# Altium PCB PCB1.PcbDoc
Units mm, origin at the board's own origin, x right, y up, seen from the top; angles counter-clockwise.
Board outline 31.16 x 27.53 mm, 2 copper layers (Top Layer, Bottom Layer); 9 components, 25 nets, 59 pads, 20 vias.
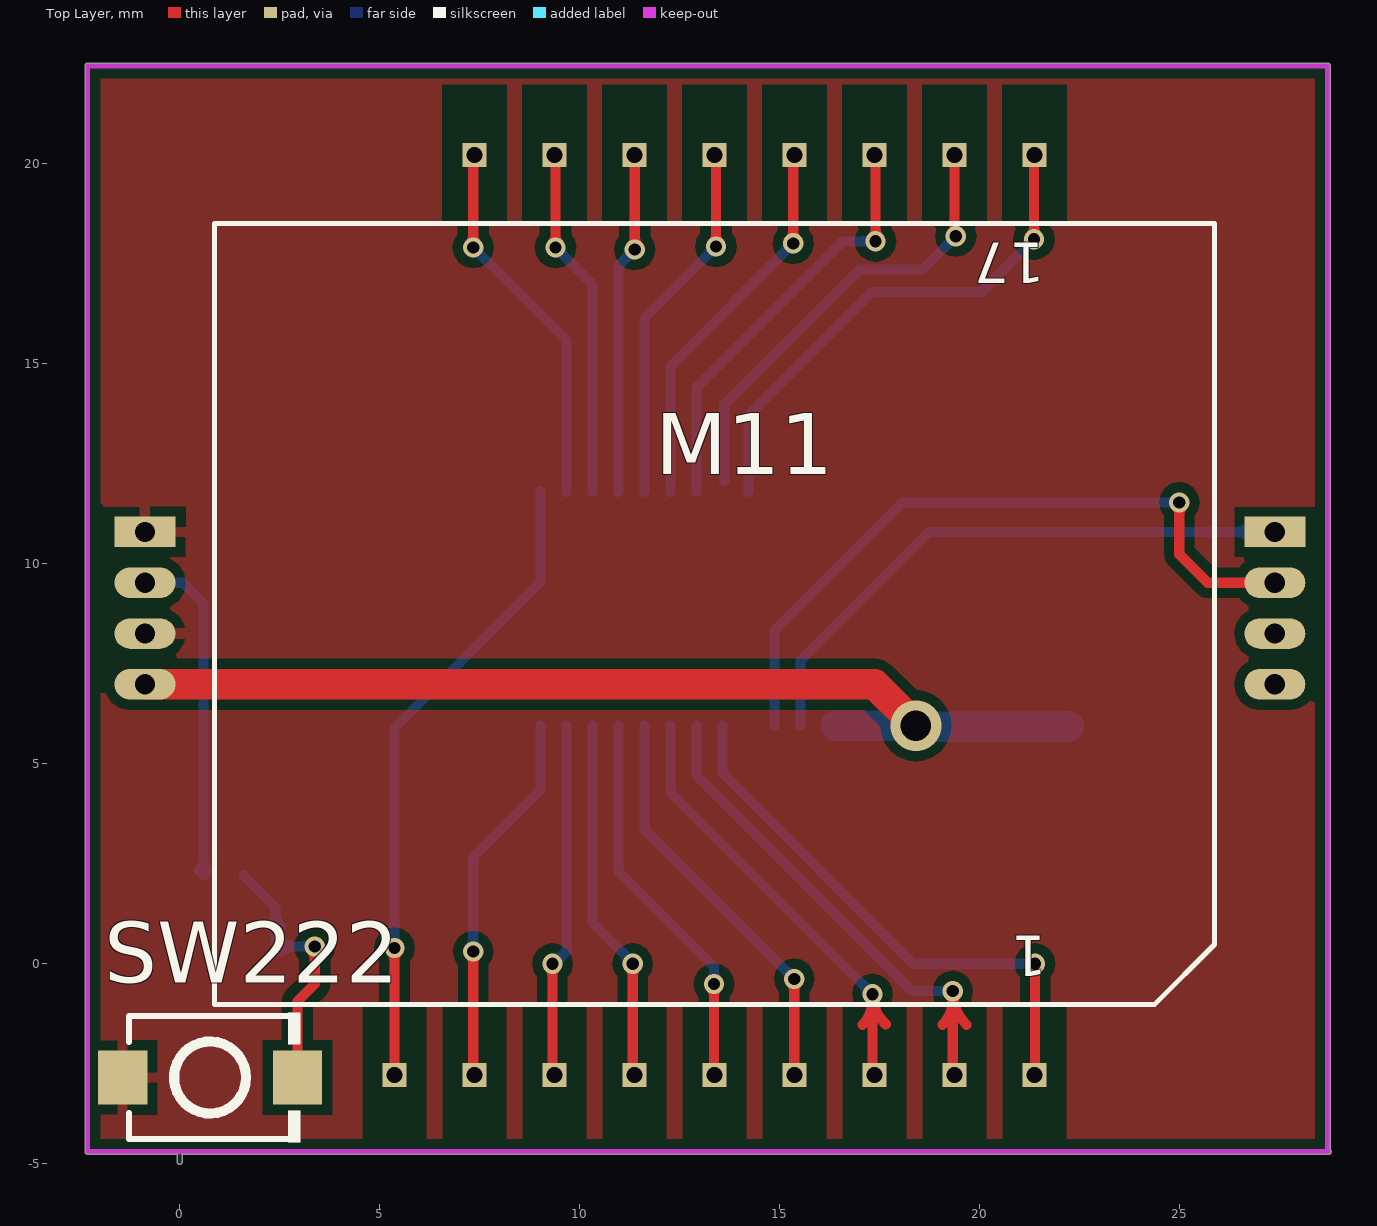
[diagram p0: Top Layer view]
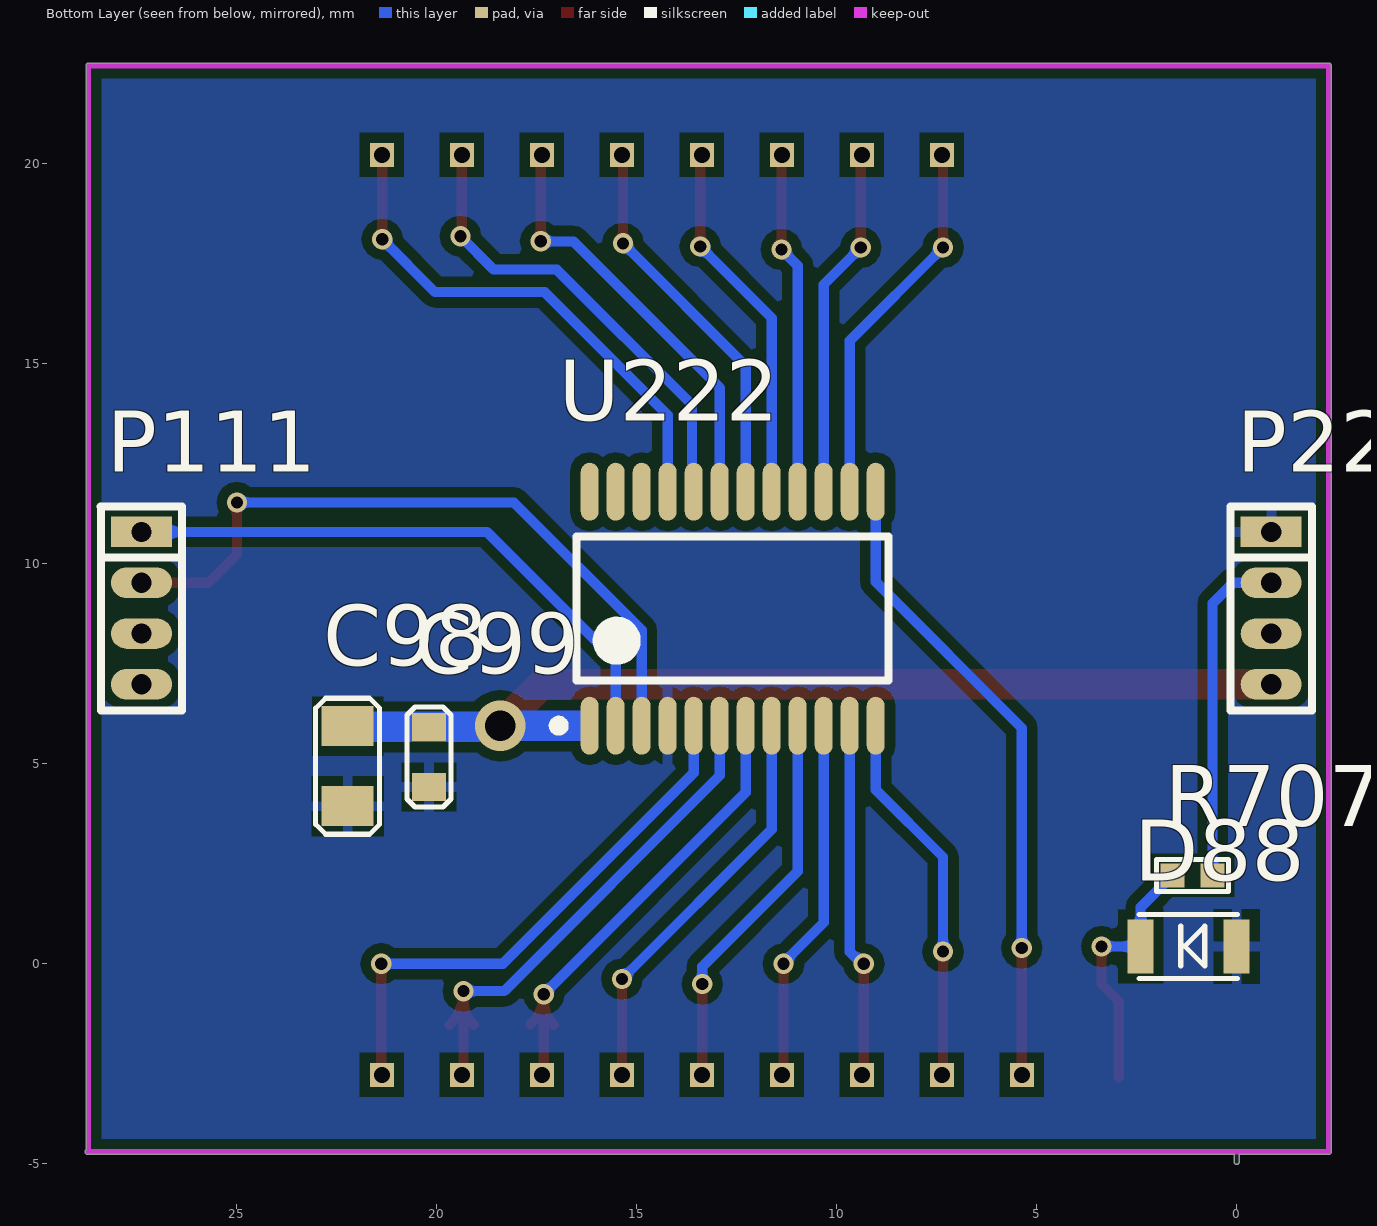
[diagram p1: Bottom Layer view, seen from below]

## Layer stack, top to bottom
Top Layer: signal copper 0.0356
Dielectric: dielectric 0.32, FR-4, Dk 4.8
Bottom Layer: signal copper 0.0356

## Board outline
-2.364,-4.7 ccw(c-2.3,-4.7) -2.3,-4.764 -0.064,-4.764 -0.064,-4.953 ccw(c0,-4.953) 0.064,-4.953 0.064,-4.764 28.727,-4.764 ccw(c28.727,-4.7) 28.791,-4.7 ccw(c28.727,-4.7) 28.764,-4.648 28.764,22.454 ccw(c28.7,22.454) 28.679,22.514 -2.261,22.514 ccw(c-2.261,22.45) -2.28,22.511 ccw(c-2.3,22.45) -2.364,22.45

## Design rules (kind name [scope] priority, off if disabled: settings)
Clearance [All] p1: gap=0.254
PolygonConnect [All] p1: connectstyle=Relief reliefconductorwidth=0.254 reliefentries=4 polygonreliefangle="90 Angle"
RoutingVias [All] p1: holewidth=0.711 width=1.27 viastyle="Through Hole" minholewidth=0.711 minwidth=1.27 maxholewidth=0.711 maxwidth=1.27
SilkscreenOverComponentPads [All] p1: minsilkscreentomaskgap=0.254
SolderMaskExpansion [All] p1: expansion=0.102
Width [All] p1: maxlimit=5.08 minlimit=0.254 preferedwidth=0.254
27 further rules are at their usual default settings.

## Components (designator, comment, footprint, x,y, rotation, side; value= is the part's Value field where it differs from the comment)
C98 "10uF/50V" 0805C 22.225,3.937 r90 bottom
C99 "0.1uF/50V" 0603C 20.193,4.42 r90 bottom
D88 "CESDB5V0D3" SOD323 0,0.432 r0 bottom
M11 "YR-90823A" YR-90823A 21.373,-2.777 r180 top locked
P111 "Header 4" 1.27-4P 27.381,10.795 r270 bottom locked
P222 "Header 4" 1.27-4P -0.864,10.795 r270 bottom locked
R707 "RESISTOR_0" 0402R 1.6,2.21 r180 bottom
SW222 "SW PUSHBUTTON" SW-SMD_L3.9-W3.0-P4.45 0.762,-2.845 r0 top
U222 "HT16C21A-24SOP" SOP65P640X265-24N 12.598,8.875 r90 bottom

## Footprints (in the part's own frame and the unit in brackets; to place one, negate y for a bottom-side part, rotate by r counter-clockwise, add the part's x,y. Pads: shape width x height; smd on the part's side, far side on the other; paste and mask are expansions set on the pad)
1.27-4P [mil]
  rect 30x60 hole 20: 1(0,0)
  oval 30x60 hole 20: 2(50,0) 3(100,0) 4(150,0)
  silkscreen extent -25,-40 176,40
0402R [mm]
  rect 0.6x0.6 smd: 1(0,0) 2(1,0)
  silkscreen extent -0.4,-0.4 1.4,0.4
0603C [mm]
  rect 0.7x0.85 smd: 1(0,0) 2(1.5,0)
  silkscreen extent -0.5,-0.55 2,0.55
0805C [mm]
  rect 1x1.3 smd: 1(0,0) 2(2,0)
  silkscreen extent -0.7,-0.8 2.7,0.8
SOD323 [mm]
  rect 0.65x1.35 smd: 1(0,0) 2(2.4,0)
  silkscreen extent -0.03,-0.8 2.44,0.8
SOP65P640X265-24N [mm] "SOP, 24-Leads, Body 7.8x4.4mm (max), Pitch 0.65mm, IPC Medium Density"
  oval 1.45x0.45 smd: 1(-2.925,3.575) 2(-2.925,2.925) 3(-2.925,2.275) 4(-2.925,1.625) 5(-2.925,0.975) 6(-2.925,0.325) 7(-2.925,-0.325) 8(-2.925,-0.975) 9(-2.925,-1.625) 10(-2.925,-2.275) 11(-2.925,-2.925) 12(-2.925,-3.575) 13(2.925,-3.575) 14(2.925,-2.925) 15(2.925,-2.275) 16(2.925,-1.625) 17(2.925,-0.975) 18(2.925,-0.325) 19(2.925,0.325) 20(2.925,0.975) 21(2.925,1.625) 22(2.925,2.275) 23(2.925,2.925) 24(2.925,3.575)
  silkscreen extent -3.05,-3.9 1.8,4.47, body extent -2.2,-3.9 2.2,3.9, height 2.65
SW-SMD_L3.9-W3.0-P4.45 [mm]
  rect 1.23x1.36 smd: 1(-2.185,0) 2(2.185,0)
  silkscreen extent -2.03,-1.62 2.25,1.62
YR-90823A [mm]
  rect 0.6x0.6 hole 0.4: 1(0,0) 2(2,0) 3(4,0) 4(6,0) 5(8,0) 6(10,0) 7(12,0) 8(14,0) 9(16,0) 10(14,-23) 11(12,-23) 12(10,-23) 13(8,-23) 14(6,-23) 15(4,-23) 16(2,-23) 17(0,-23)
  silkscreen extent -4.5,-21.29 20.5,-1.75

## Part data
C98 C99: library part Cap, "Capacitor"
D88: library part "DIODE S", "Schottky Diode"
P111 P222: "Header, 4-Pin"

## Via types
v1: diameter 0.508, hole 0.305, Top Layer to Bottom Layer, tented both sides, 19 vias
v2: diameter 1.27, hole 0.762, Top Layer to Bottom Layer, tented both sides, 1 vias

## Nets (pads, with @x,y where several pads share a name; then routed paths per layer and width w, separated by ;. In a path a pad name is that pad's centre, name@x,y a point inside that pad or via, vN(x,y) a via of type N, cw(c..) or ccw(c..) an arc to the next point about the centre after c; other vN are vias at no path point)
COM0: M11.1 U222.5 | length 15.7
  Top Layer w0.254: M11.1@21.387,-2.763 v1(21.387,0) ; 21.387,-0.307 cw(c21.693,-0.307) 21.477,-0.09 ccw(c21.693,-0.307) 21.387,-0.307 ; 21.387,-0.307 ccw(c21.08,-0.307) 21.297,-0.09 cw(c21.08,-0.307) 21.387,-0.307
  Bottom Layer w0.254: U222.5 13.573,4.773 18.346,0 v1(21.387,0) v1@21.438,0 ; 21.08,0 cw(c21.08,-0.307) 21.297,-0.09 ccw(c21.08,-0.307) 21.08,0 ; 21.08,0 ccw(c21.08,0.307) 21.297,0.09 cw(c21.08,0.307) 21.08,0
COM1: M11.2 U222.6 | length 17.1
  Top Layer w0.254: M11.2@19.329,-2.733 v1(19.329,-0.686) ; 19.329,-0.992 cw(c19.636,-0.992) 19.419,-0.776 ccw(c19.636,-0.992) 19.329,-0.992 ; 19.329,-0.992 ccw(c19.023,-0.992) 19.24,-0.776 cw(c19.023,-0.992) 19.329,-0.992 ; 19.074,-1.527 ccw(c18.456,-0.91) 19.329,-0.91 cw(c18.456,-0.91) 19.074,-1.527 ; v1@19.329,-0.701 ccw(c20.499,-0.701) 19.672,-1.527 cw(c20.499,-0.701) v1@19.329,-0.701
  Bottom Layer w0.254: U222.6 12.923,4.704 18.313,-0.686 v1(19.329,-0.686) ; 19.023,-0.686 cw(c19.023,-0.992) 19.24,-0.776 ccw(c19.023,-0.992) 19.023,-0.686 ; 19.023,-0.686 ccw(c19.023,-0.379) 19.24,-0.596 cw(c19.023,-0.379) 19.023,-0.686
COM2: M11.3 U222.7 | length 15.7
  Top Layer w0.254: M11.3@17.323,-2.727 v1(17.323,-0.762) ; 17.323,-1.069 cw(c17.629,-1.069) 17.413,-0.852 ccw(c17.629,-1.069) 17.323,-1.069 ; 17.323,-1.069 ccw(c17.016,-1.069) 17.233,-0.852 cw(c17.016,-1.069) 17.323,-1.069 ; v1(17.323,-0.762) ccw(c18.334,-0.762) 17.656,-1.513 cw(c18.334,-0.762) v1(17.323,-0.762) ; 17.074,-1.527 ccw(c16.472,-0.926) 17.323,-0.926 cw(c16.472,-0.926) 17.074,-1.527
  Bottom Layer w0.254: U222.7 12.273,4.287 v1(17.323,-0.762) ; 17.106,-0.545 cw(c16.889,-0.762) 17.196,-0.762 ccw(c16.889,-0.762) 17.106,-0.545 ; 17.106,-0.545 ccw(c17.323,-0.328) 17.323,-0.635 cw(c17.323,-0.328) 17.106,-0.545
COM3: M11.4 U222.8 | length 12.2
  Top Layer w0.254: M11.4@15.367,-2.771 v1(15.367,-0.381) ; 15.367,-0.688 cw(c15.674,-0.688) 15.457,-0.471 ccw(c15.674,-0.688) 15.367,-0.688 ; 15.367,-0.688 ccw(c15.06,-0.688) 15.277,-0.471 cw(c15.06,-0.688) 15.367,-0.688
  Bottom Layer w0.254: U222.8 11.623,3.363 v1(15.367,-0.381) v1@15.367,-0.356 ; 15.15,-0.164 cw(c14.933,-0.381) 15.24,-0.381 ccw(c14.933,-0.381) 15.15,-0.164 ; 15.15,-0.164 ccw(c15.367,0.053) 15.367,-0.254 cw(c15.367,0.053) 15.15,-0.164
GND: C98.1 C99.1 D88.1 P222.1 P222.3 SW222.1 U222.4
I2C_SCL: P111.4
I2C_SDA: P111.3
KEY: P222.2 R707.2 | length 9.8
  Bottom Layer w0.254: P222.2 0.087,9.525 0.6,9.011 R707.2 ; 0.6,2.627 cw(c0.183,2.627) 0.478,2.332 ccw(c0.183,2.627) 0.6,2.627 ; 0.6,2.627 ccw(c1.018,2.627) 0.723,2.332 cw(c1.018,2.627) 0.6,2.627
LCD_I2C_SCL: P111.2 U222.3 | length 19.7
  Top Layer w0.254: v1(24.994,11.532) 24.994,10.236 25.705,9.525 P111.2 ; 24.994,11.225 cw(c25.3,11.225) 25.083,11.442 ccw(c25.3,11.225) 24.994,11.225 ; 24.994,11.225 ccw(c24.687,11.225) 24.904,11.442 cw(c24.687,11.225) 24.994,11.225
  Bottom Layer w0.254: U222.3 14.873,8.336 18.069,11.532 v1(24.994,11.532) ; 24.687,11.532 cw(c24.687,11.225) 24.904,11.442 ccw(c24.687,11.225) 24.687,11.532 ; 24.687,11.532 ccw(c24.687,11.838) 24.904,11.621 cw(c24.687,11.838) 24.687,11.532
LCD_I2C_SDA: P111.1 U222.2 | length 16.7
  Bottom Layer w0.254: U222.2 15.523,7.573 18.745,10.795 P111.1 ; 26.387,10.795 cw(c26.387,10.182) 26.821,10.615 ccw(c26.387,10.182) 26.387,10.795 ; 26.387,10.795 ccw(c26.387,11.408) 26.821,10.975 cw(c26.387,11.408) 26.387,10.795
NetD88_2: D88.2 R707.1 SW222.2 | length 11.5
  Top Layer w0.254: SW222.2 2.947,-0.939 3.378,-0.508 v1(3.378,0.432) ; 3.378,0.125 cw(c3.685,0.125) 3.468,0.342 ccw(c3.685,0.125) 3.378,0.125 ; 3.378,0.125 ccw(c3.072,0.125) 3.288,0.342 cw(c3.072,0.125) 3.378,0.125
  Bottom Layer w0.254: R707.1 2.4,1.41 D88.2 v1(3.378,0.432) ; 2.4,1.26 cw(c1.922,1.26) 2.26,0.922 ccw(c1.922,1.26) 2.4,1.26 ; 2.4,1.26 ccw(c2.878,1.26) 2.54,0.922 cw(c2.878,1.26) 2.4,1.26 ; 2.878,0.432 cw(c2.878,0.91) 2.54,0.572 ccw(c2.878,0.91) 2.878,0.432 ; 2.878,0.432 ccw(c2.878,-0.046) 2.54,0.292 cw(c2.878,-0.046) 2.878,0.432 ; 3.072,0.432 cw(c3.072,0.125) 3.288,0.342 ccw(c3.072,0.125) 3.072,0.432 ; 3.072,0.432 ccw(c3.072,0.738) 3.288,0.522 cw(c3.072,0.738) 3.072,0.432
SEG1: M11.5 U222.9 | length 11.6
  Top Layer w0.254: M11.5@13.36,-2.764 v1(13.36,-0.508) ; 13.36,-0.815 cw(c13.667,-0.815) 13.45,-0.598 ccw(c13.667,-0.815) 13.36,-0.815 ; 13.36,-0.815 ccw(c13.054,-0.815) 13.271,-0.598 cw(c13.054,-0.815) 13.36,-0.815
  Bottom Layer w0.254: U222.9 10.973,2.311 13.36,-0.076 v1(13.36,-0.508) ; 13.36,-0.201 cw(c13.054,-0.201) 13.271,-0.418 ccw(c13.054,-0.201) 13.36,-0.201 ; 13.36,-0.201 ccw(c13.667,-0.201) 13.45,-0.418 cw(c13.667,-0.201) 13.36,-0.201
SEG2: M11.6 U222.10 | length 11
  Top Layer w0.254: M11.6@11.328,-2.732 v1(11.328,0) ; 11.328,-0.307 cw(c11.635,-0.307) 11.418,-0.09 ccw(c11.635,-0.307) 11.328,-0.307 ; 11.328,-0.307 ccw(c11.022,-0.307) 11.239,-0.09 cw(c11.022,-0.307) 11.328,-0.307
  Bottom Layer w0.254: U222.10 10.323,1.03 v1@11.354,0 ; 11.094,0.26 cw(c10.833,0) 11.201,0 ccw(c10.833,0) 11.094,0.26 ; 11.155,0.199 ccw(c11.328,0.372) 11.328,0.127 cw(c11.328,0.372) 11.155,0.199
SEG3: M11.7 U222.11 | length 10.4
  Top Layer w0.254: M11.7@9.322,-2.726 v1(9.322,0) ; 9.322,-0.307 cw(c9.628,-0.307) 9.412,-0.09 ccw(c9.628,-0.307) 9.322,-0.307 ; 9.322,-0.307 ccw(c9.015,-0.307) 9.232,-0.09 cw(c9.015,-0.307) 9.322,-0.307
  Bottom Layer w0.254: v1@9.373,0 9.673,0.301 U222.11 ; v1@9.322,0.127 ccw(c9.322,0.556) 9.625,0.253 cw(c9.322,0.556) v1@9.322,0.127
SEG4: M11.8 U222.12 | length 11.3
  Top Layer w0.254: M11.8@7.341,-2.744 v1(7.341,0.305) ; 7.341,-0.002 cw(c7.647,-0.002) 7.43,0.215 ccw(c7.647,-0.002) 7.341,-0.002 ; 7.341,-0.002 ccw(c7.034,-0.002) 7.251,0.215 cw(c7.034,-0.002) 7.341,-0.002
  Bottom Layer w0.254: v1(7.341,0.305) 7.341,2.667 9.023,4.35 U222.12 ; 7.341,0.611 cw(c7.034,0.611) 7.251,0.395 ccw(c7.034,0.611) 7.341,0.611 ; 7.341,0.611 ccw(c7.647,0.611) 7.43,0.395 cw(c7.647,0.611) 7.341,0.611
SEG5: M11.9 U222.13 | length 18
  Top Layer w0.254: M11.9 v1(5.373,0.393) ; 5.373,0.086 cw(c5.679,0.086) 5.463,0.303 ccw(c5.679,0.086) 5.373,0.086 ; 5.373,0.086 ccw(c5.066,0.086) 5.283,0.303 cw(c5.066,0.086) 5.373,0.086
  Bottom Layer w0.254: v1(5.373,0.393) 5.373,5.895 9.023,9.545 U222.13 ; 5.373,0.7 cw(c5.066,0.7) 5.283,0.483 ccw(c5.066,0.7) 5.373,0.7 ; 5.373,0.7 ccw(c5.679,0.7) 5.463,0.483 cw(c5.679,0.7) 5.373,0.7
SEG6: M11.10 U222.14 | length 10.4
  Top Layer w0.254: v1@7.251,17.997 ccw(c7.034,18.214) 7.341,18.214 ccw(c7.647,18.214) v1@7.43,17.997 ; v1(7.341,17.907) 7.341,20.191 M11.10
  Bottom Layer w0.254: v1@7.341,17.78 cw(c7.341,17.473) 7.557,17.69 cw(c7.774,17.907) v1@7.468,17.907 ; v1(7.341,17.907) 9.673,15.574 U222.14
SEG7: M11.11 U222.15 | length 9.8
  Top Layer w0.254: v1@9.308,17.997 ccw(c9.091,18.214) 9.398,18.214 ccw(c9.705,18.214) v1@9.488,17.997 ; M11.11 9.398,20.198 v1(9.398,17.907)
  Bottom Layer w0.254: v1@9.398,17.78 cw(c9.398,17.473) 9.615,17.69 cw(c9.832,17.907) v1@9.525,17.907 ; v1(9.398,17.907) 10.323,16.982 U222.15
SEG8: M11.12 U222.16 | length 9.6
  Top Layer w0.254: v1@11.289,17.946 ccw(c11.073,18.163) 11.379,18.163 ccw(c11.686,18.163) v1@11.469,17.946 ; M11.12 11.379,20.217 v1(11.379,17.856)
  Bottom Layer w0.254: U222.16 10.973,17.45 v1(11.379,17.856) ; v1@11.252,17.856 cw(c10.946,17.856) 11.162,17.639 cw(c11.379,17.423) v1@11.379,17.729
SEG9: M11.13 U222.17 | length 10.1
  Top Layer w0.254: v1@13.321,18.022 ccw(c13.105,18.239) 13.411,18.239 ccw(c13.718,18.239) v1@13.501,18.022 ; M11.13 13.411,20.185 v1(13.411,17.932)
  Bottom Layer w0.254: U222.17 11.623,16.145 v1(13.411,17.932) ; v1@13.284,17.932 cw(c12.978,17.932) 13.194,17.716 cw(c13.411,17.499) v1@13.411,17.805
SEG10: M11.14 U222.18 | length 10.7
  Top Layer w0.254: v1@15.252,18.098 ccw(c15.035,18.315) 15.342,18.315 ccw(c15.648,18.315) v1@15.431,18.098 ; v1(15.342,18.009) 15.342,20.192 M11.14
  Bottom Layer w0.254: U222.18 12.273,14.94 v1(15.342,18.009) ; v1@15.215,18.009 cw(c14.908,18.009) 15.125,17.792 cw(c15.342,17.575) v1@15.342,17.882
SEG11: M11.15 U222.19 | length 11.7
  Top Layer w0.254: v1@17.309,18.149 ccw(c17.092,18.366) 17.399,18.366 ccw(c17.706,18.366) v1@17.489,18.149 ; M11.15 17.399,20.197 v1(17.399,18.059)
  Bottom Layer w0.254: U222.19 12.923,14.397 16.586,18.059 17.221,18.059 v1(17.399,18.059) ; v1@17.309,17.97 ccw(c17.092,17.753) 17.092,18.059 ccw(c17.092,18.366) v1@17.309,18.149
SEG12: M11.16 U222.20 | length 11.5
  Top Layer w0.254: M11.16 19.373,18.219 v1(19.406,18.186)
  Bottom Layer w0.254: U222.20@13.617,12.065 13.617,13.973 16.997,17.352 18.572,17.352 v1(19.406,18.186)
SEG13: M11.17 U222.21 | length 14.9
  Top Layer w0.254: v1(21.361,18.11) M11.17@21.361,20.212 ; 21.361,18.417 cw(c21.055,18.417) 21.272,18.2 ccw(c21.055,18.417) 21.361,18.417 ; 21.361,18.417 ccw(c21.668,18.417) 21.451,18.2 cw(c21.668,18.417) 21.361,18.417
  Bottom Layer w0.254: U222.21 14.223,12.598 14.223,13.715 17.297,16.789 20.041,16.789 v1(21.361,18.11) ; 21.145,17.893 cw(c21.361,17.677) 21.361,17.983 ccw(c21.361,17.677) 21.145,17.893 ; 21.145,17.893 ccw(c20.928,18.11) 21.234,18.11 cw(c20.928,18.11) 21.145,17.893
VDD33: C98.2 C99.2 P222.4 U222.1 | length 25.5
  Top Layer w0.762: P222.4 17.374,6.985 v2(18.409,5.95)
  Bottom Layer w0.762: 16.408,5.95 v2(18.409,5.95) ; v2@18.439,5.92 C99.2 22.208,5.92 C98.2
pads on no net: U222.22 U222.23 U222.24

## Polygon pours and split planes (outlines as drawn)
GND on Top Layer "L1_TOP-No Net" (solid, remove dead copper, pour order 1000): -4.699,24.435 -4.242,24.892 31.547,24.892 31.547,-5.004 28.677,-7.874 28.169,-7.366 -6.858,-7.366 -6.858,21.717 -3.734,24.841
GND on Bottom Layer "L1_TOP-No Net" (solid, remove dead copper, pour order 1001): -4.699,24.435 -4.242,24.892 31.547,24.892 31.547,-5.004 28.677,-7.874 28.169,-7.366 -6.858,-7.366 -6.858,21.717 -3.734,24.841

## Keep-outs
Keep-Out Layer:
  lines w0.127: -2.3,22.45 -2.3,-4.7 28.727,-4.7 ; -2.261,22.45 28.7,22.45 ; 28.7,-4.7 28.7,22.454

## Silkscreen, mask and mechanical layers (free items; w line width, h text height)
Mechanical 1:
  lines w0.127: -2.3,22.45 -2.3,-4.7 28.727,-4.7 ; -2.261,22.45 28.7,22.45 ; 28.7,-4.7 28.7,22.454
Mechanical 15:
  lines w0.127: 0,0 0,17.512 ; 0,0 26.746,0 ; 0,0 0,17.512 ; 0,0 26.746,0 ; 0,17.512 26.746,17.512 ; 0,17.512 26.746,17.512 ; 26.746,0 26.746,17.512 ; 26.746,0 26.746,17.512
Mechanical 22:
  lines w0.127: 22.892,121.179 22.892,121.179 ; 22.892,121.179 22.892,122.679 ; 22.892,121.179 47.632,121.179 ; 22.892,122.679 22.892,122.679 ; 22.892,122.679 47.632,122.679 ; 47.632,121.179 47.632,121.179 ; 47.632,121.179 47.632,122.679 ; 47.632,122.679 47.632,122.679 ; 246.632,206.625 258.583,213.524 ; 246.632,206.625 246.632,207.85 ; 246.632,206.625 264.126,196.525 ; 246.632,207.85 258.583,214.749 ; 246.632,207.85 264.126,197.75 ; 258.583,213.524 258.583,214.749 ; 258.583,213.524 276.076,203.425 ; 258.583,214.749 276.076,204.649 ; 264.126,196.525 276.076,203.425 ; 264.126,196.525 264.126,197.75 ; 264.126,197.75 276.076,204.649 ; 276.076,203.425 276.076,204.649 ; 22.892,204.871 22.892,221.771 47.632,221.771 47.632,204.871 22.892,204.871 ; 107.825,204.871 107.825,221.771 109.325,221.771 109.325,204.871 107.825,204.871
Mechanical 24:
  lines w0.127: 11.262,118.08 11.262,119.68 ; 11.262,223.341 11.262,223.341 ; 22.862,118.08 22.862,119.68 ; 23.862,118.079 23.862,119.679 ; 35.862,118.079 35.862,119.679 ; 36.862,118.08 36.862,119.68 ; 52.762,118.08 52.762,119.68 ; 53.762,119.68 53.762,119.681 53.762,118.081 ; 54.762,118.081 54.762,119.681 ; 57.262,119.68 57.262,118.08 60.262,118.08 60.262,118.081 ; 59.262,118.079 59.262,118.081 59.262,119.681 ; 59.262,223.341 59.262,223.341 ; 110.824,163.341 112.424,163.341 ; 110.824,184.145 112.424,184.145 ; 110.825,189.341 112.425,189.341 ; 110.825,196.341 112.425,196.341 ; 110.825,199.341 112.425,199.341 ; 110.825,200.341 112.425,200.341 ; 110.825,201.341 112.425,201.341 ; 110.825,201.537 112.425,201.537 ; 110.825,202.341 112.425,202.341 ; 110.825,222.341 112.425,222.341 ; 235.206,207.809 250.055,216.382 250.055,217.689 235.206,209.115 235.206,206.992 243.408,202.257 ; 235.206,208.299 243.408,203.563 ; 238.802,174.129 238.802,175.435 ; 239.095,174.537 264.551,189.234 264.551,190.54 ; 254.015,197.766 253.59,198.011 245.529,202.665 245.529,203.972 254.015,199.073 254.015,198.256 ; 254.308,197.358 254.308,198.664 ; 258.197,182.58 258.197,181.273 cw(c260.235,181.271) 258.249,181.726 cw(c260.363,181.242) 258.306,181.929 ; 264.551,190.05 264.126,190.295 253.308,196.542 ; 285.41,196.787 251.469,216.382 251.469,217.689 257.571,214.165 276.076,203.482 285.41,198.093 285.41,197.276 ; 285.703,196.378 285.703,197.685 ; 10.262,118.08 10.262,119.68 60.262,119.681 ; 10.262,118.079 10.262,118.08 ; 10.262,118.08 60.262,118.081 ; 10.262,201.341 10.262,201.341 ; 10.262,201.341 10.262,222.341 ; 10.262,201.341 11.262,200.341 ; 10.262,222.341 cw(c11.262,222.341) 11.262,223.341 ; 10.262,222.341 10.262,222.341 ; 11.262,200.341 11.262,200.341 ; 11.262,200.341 22.862,200.341 ; 11.262,223.341 59.262,223.341 ; 22.862,200.341 22.862,200.341 ; 22.862,200.341 22.862,201.341 ; 22.862,201.341 cw(c23.862,201.341) 23.862,202.341 ; 22.862,201.341 22.862,201.341 ; 23.862,202.341 23.862,202.341 ; 23.862,202.341 35.862,202.341 ; 35.862,202.341 cw(c35.862,201.341) 36.862,201.341 ; 35.862,202.341 35.862,202.341 ; 36.862,200.341 36.862,201.341 ; 36.862,200.341 36.862,200.341 ; 36.862,200.341 52.762,200.341 ; 36.862,201.341 36.862,201.341 ; 52.762,200.341 52.762,200.341 ; 52.762,200.341 53.762,199.341 ; 53.762,118.08 53.762,118.081 ; 53.762,163.341 ccw(c54.762,163.341) 54.762,162.341 ; 53.762,163.341 53.762,199.341 ; 53.762,163.341 53.762,163.341 ; 53.762,199.341 53.762,199.341 ; 54.762,162.341 59.262,162.341 ; 54.762,162.341 54.762,162.341 ; 57.262,189.341 ccw(c63.262,189.341) 60.262,184.145 ; 57.262,189.341 57.262,189.341 ; 57.262,189.341 57.262,196.341 ; 57.262,196.341 cw(c63.262,196.341) 60.262,201.537 ; 57.262,196.341 57.262,196.341 ; 59.262,162.341 ccw(c59.262,163.341) 60.262,163.341 ; 59.262,162.341 59.262,162.341 ; 59.262,223.341 cw(c59.262,222.341) 60.262,222.341 ; 60.262,118.081 60.262,119.681 ; 60.262,119.68 60.262,119.681 ; 60.262,163.341 60.262,184.145 ; 60.262,163.341 60.262,163.341 ; 60.262,184.145 60.262,184.145 ; 60.262,201.537 60.262,222.341 ; 60.262,201.537 60.262,201.537 ; 60.262,222.341 60.262,222.341 ; 239.095,175.027 242.277,173.19 242.277,171.884 239.095,173.721 239.095,175.027 ; 239.095,175.027 239.095,175.844 264.551,190.54 ; 243.408,202.257 244.115,202.665 244.115,203.972 243.408,203.563 ; 243.408,202.257 243.408,203.563 ; 253.308,196.542 254.015,196.95 254.015,198.256 ; 253.308,196.542 253.308,197.848 ; 253.308,197.848 254.015,198.256 ; 253.308,197.848 264.551,191.357 264.551,190.54 ; 285.41,197.276 270.7,188.783 270.7,187.477 285.41,195.97 285.41,197.276 ; 110.824,162.341 112.424,162.341 112.425,223.341 110.825,223.341 110.824,162.341 ; 243.691,171.884 243.691,173.19 258.402,181.683 258.402,180.377 243.691,171.884 ; 259.954,183.723 264.904,186.58 264.904,187.887 259.954,185.029 259.954,183.723
Mechanical 30:
  circle w0.064: c22.892,221.771 r0.032
  circle w0.064: c47.632,221.771 r0.032
  circle w0.064: c47.632,231.265 r0.032
  circle w0.064: c22.892,221.771 r0.032
  circle w0.064: c22.892,204.871 r0.032
  circle w0.064: c15.446,204.871 r0.032
  circle w0.064: c11.262,200.341 r0.032
  circle w0.064: c11.262,223.341 r0.032
  circle w0.064: c-0.291,223.341 r0.032
  circle w0.064: c60.262,222.341 r0.032
  circle w0.064: c10.262,222.341 r0.032
  circle w0.064: c10.262,237.965 r0.032
  circle w0.064: c110.824,162.341 r0.032
  circle w0.064: c112.424,162.341 r0.032
  circle w0.064: c112.424,154.465 r0.032
  circle w0.064: c107.825,221.771 r0.032
  circle w0.064: c109.325,221.771 r0.032
  circle w0.064: c109.325,232.056 r0.032
  circle w0.064: c59.262,162.341 r0.032
  circle w0.064: c59.262,223.341 r0.032
  circle w0.064: c70.221,223.341 r0.032
  circle w0.064: c22.892,122.679 r0.032
  circle w0.064: c22.862,118.08 r0.032
  circle w0.064: c8.56,118.08 r0.032
  circle w0.064: c64.392,77.367 r0.032
  circle w0.064: c53.433,77.367 r0.032
  circle w0.064: c53.433,16.367 r0.032
  circle w0.064: c4.433,91.991 r0.032
  circle w0.064: c4.433,76.367 r0.032
  circle w0.064: c54.433,76.367 r0.032
  circle w0.064: c-6.12,77.367 r0.032
  circle w0.064: c5.433,77.367 r0.032
  circle w0.064: c5.433,54.367 r0.032
  circle w0.064: c9.616,58.897 r0.032
  circle w0.064: c17.063,58.897 r0.032
  circle w0.064: c17.063,75.797 r0.032
  circle w0.064: c41.803,85.291 r0.032
  circle w0.064: c41.803,75.797 r0.032
  circle w0.064: c17.063,75.797 r0.032

## Dimensions
0,17.512 to 0,0 on Mechanical 1
0,0 to 26.746,0 on Mechanical 1

## Text inside footprints (layer, text, board x,y; h text height)
M11: Top Overlay "1" at 21.678,0.703 h1.02 r180; Top Overlay "17" at 21.627,18.026 h1.02 r180